# Altium PCB LCT PCB.PcbDoc (part 2 of 2)
Units mm, origin at the board's own origin, x right, y up, seen from the top; angles counter-clockwise.
Board outline 112 x 147.95 mm, 6 copper layers (Top, Gnd, HighSpeed, High speed, Power, Bottom), stack 2.576 mm thick; 249 components, 161 nets, 810 pads, 262 vias.
Unrouted connection lines stored in the file: 3.
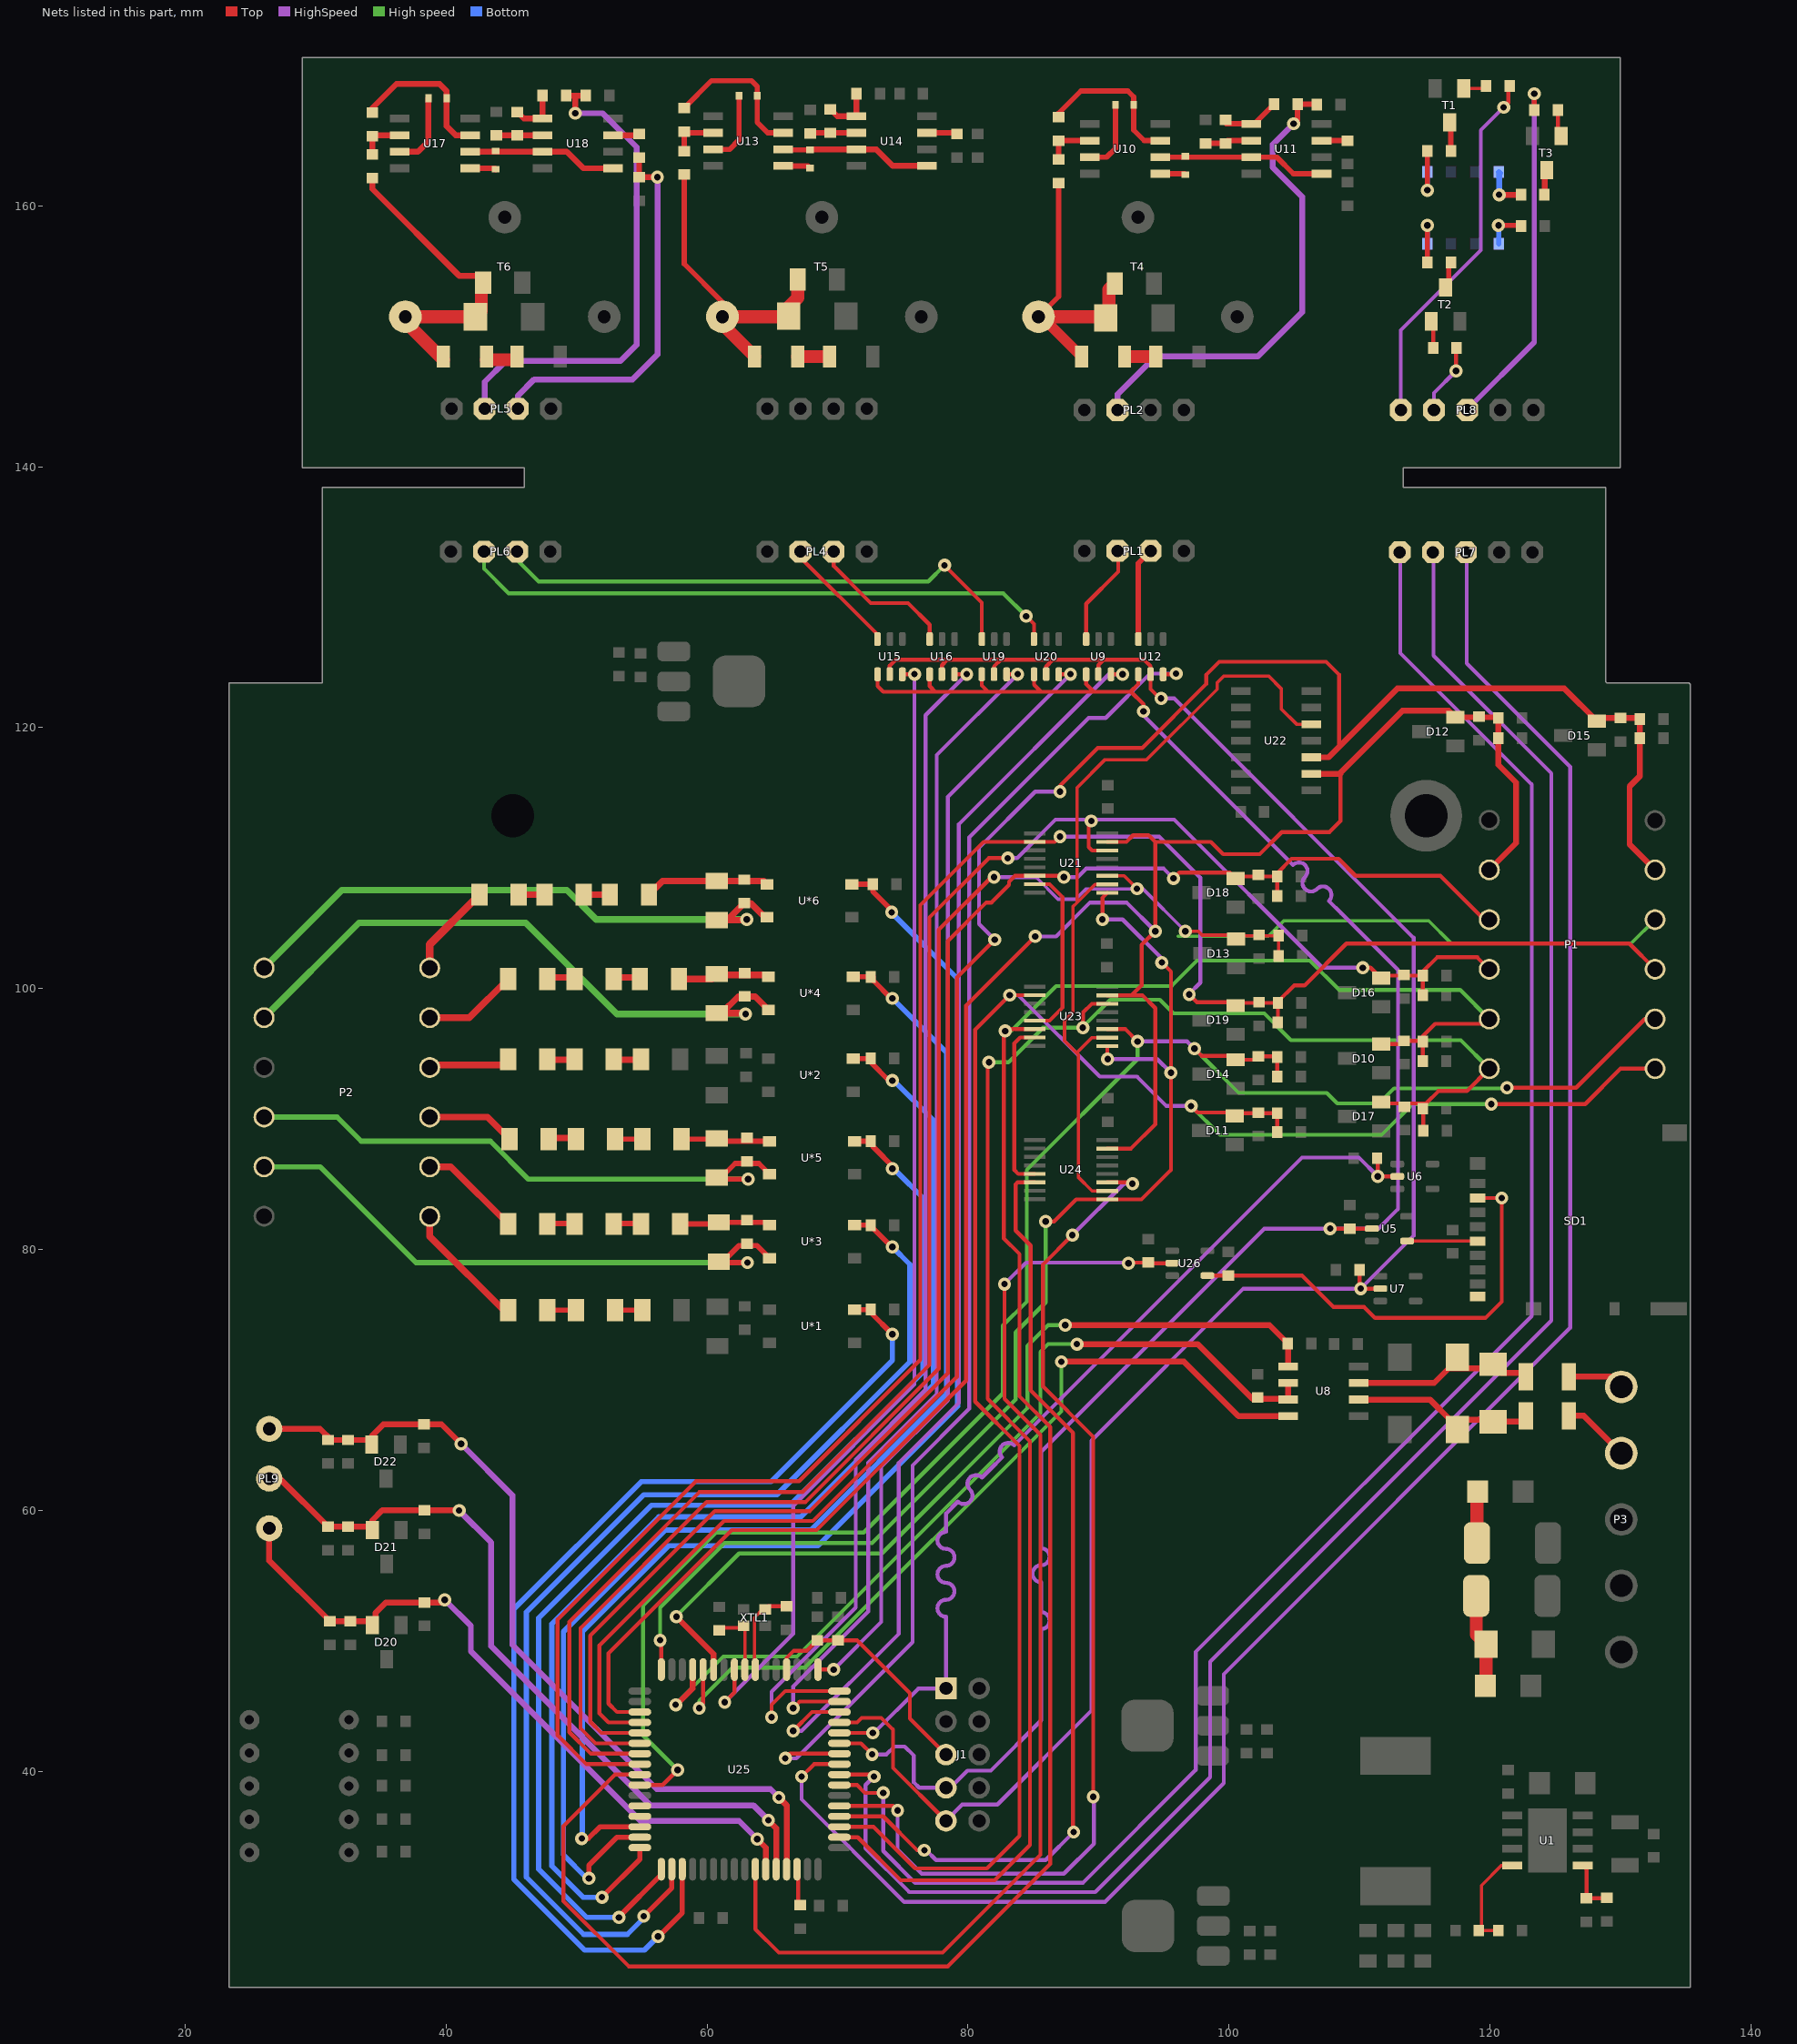
[diagram p6: the nets of this part, all layers, seen from the top]

## Via types
v1: diameter 1, hole 0.5, Top to Bottom, 262 vias

## Nets (pads, with @x,y where several pads share a name; then routed paths per layer and width w, separated by ;. In a path a pad name is that pad's centre, name@x,y a point inside that pad or via, vN(x,y) a via of type N, cw(c..) or ccw(c..) an arc to the next point about the centre after c; other vN are vias at no path point) (continued)
NetC20_1: C20.1 P2.3 R56.1 U*3.2 | length 47.3
  Top w0.4: v1(63.1,79) 60.98,79 R56.1@60.9,79.08 61.23,79.08 62.45,80.3 62.9,80.3 C20.1@63.05,80.45 63.2,80.3 63.832,80.3 U*3.2@64.8,79.332
  High speed w0.4: P2.3@26.05,86.34 30.36,86.34 37.7,79 v1(63.1,79)
NetC20_2: C20.2 R53.2 R56.2 U*3.1 | length 7.1
  Top w0.4: R53.2@57.95,81.96 60.78,81.96 R56.2@60.9,82.08 R56.2@60.97,82.08 ; R56.2@60.865,82.115 60.9,82.15 R56.2@60.97,82.08 ; U*3.1@64.8,82.04 64.76,82.08 R56.2@60.97,82.08
NetC21_1: C21.1 P2.9 R60.1 U*4.2 | length 50.1
  Top w0.5: v1(62.95,98.05) 62.88,98.12 R60.1@60.75,98.12 61.12,98.12 62.397,99.397 C21.1@62.9,99.397 63.681,99.397 U*4.2@64.7,98.378 ; U*4.2@64.563,98.497 U*4.2@64.7,98.36
  High speed w0.5: P2.9@26.05,97.77 33.33,105.05 46.1,105.05 53.1,98.05 v1(62.95,98.05)
NetC21_2: C21.2 R57.2 R60.2 U*4.1 | length 7.1
  Top w0.5: R57.2@57.85,100.74 60.37,100.74 R60.2@60.75,101.12 ; R60.2@60.75,101.05 64.55,101.05 U*4.1@64.7,100.9
NetC22_1: C22.1 P2.5 R66.1 U*5.2 | length 46.7
  Top w0.4: v1(63.15,85.4) 60.64,85.4 R66.1@60.75,85.51 61.06,85.51 62.15,86.6 62.9,86.6 C22.1@63.05,86.75 63.2,86.6 63.964,86.6 U*5.2@64.8,85.764
  High speed w0.4: P2.5@26.05,90.15 31.65,90.15 33.5,88.3 43.4,88.3 46.3,85.4 v1(63.15,85.4)
NetC22_2: C22.2 R63.2 R66.2 U*5.1 | length 6.9
  Top w0.4: R63.2@58.05,88.47 60.71,88.47 R66.2@60.75,88.51 60.956,88.304 U*5.1@64.8,88.304
NetC23_1: C23.1 P2.11 R70.1 U*6.2 | length 46.8
  Top w0.5: R70.1@60.75,105.25 R70.1@61.55,105.25 ; v1(63.05,105.3) 63,105.25 R70.1@61.55,105.25 ; U*6.2@64.6,105.46 64.44,105.46 63.35,106.55 C23.1@62.85,106.55 R70.1@61.55,105.25
  High speed w0.5: P2.11@26.05,101.58 32.02,107.55 49.25,107.55 51.5,105.3 v1(63.05,105.3)
NetC23_2: C23.2 R67.2 R70.2 U*6.1 | length 9.6
  Top w0.5: R67.2@55.55,107.2 56.6,108.25 R70.2@60.75,108.25 64.35,108.25 U*6.1@64.6,108
NetC24_2: C24.2 D10.2 P1.10 R71.2 R75.2 U23.6 U25.41 | length 175.8
  Top w0.3: U25.41@54.85,39.75 52.95,39.75 49,35.8 49,30.05 54,25.05 78.45,25.05 86.3,32.9 86.3,66.4 83.95,68.75 83.95,79.65 82.75,80.85 82.75,96.35 83.3,96.9 U23.6@85.125,96.9 ; D10.2@111.65,95.75 113.147,95.75 R75.2@113.4,96.003 114.797,96.003 R71.2@114.85,95.95 114.847,95.947 C24.2@114.847,94.45 ; R71.2@114.85,95.6 114.85,96.35 115.8,97.3 119.58,97.3 P1.10@119.95,97.67
  High speed w0.3: v1(82.85,96.75) 83.3,96.75 86.75,100.2 95.6,100.2 97.55,102.15 106.2,102.15 108.45,99.9 117.72,99.9 P1.10@119.95,97.67
NetC25_2: C25.2 D11.2 P1.11 R72.2 R76.2 U23.2 U25.3 | length 149.5
  Top w0.3: U25.3@70.15,35.75 72.75,35.75 75.95,32.55 81.45,32.55 83.95,35.05 83.95,64.95 80.55,68.35 80.55,96.85 v1(83.2,99.5) U23.2@85.125,99.5 ; v1(97.1,91) 97.6,90.5 100.185,90.5 D11.2@100.45,90.235 100.665,90.45 R72.2@103.7,90.45 R76.2@103.7,89 ; v1(120.1,91.15) 127.3,91.15 130.01,93.86 P1.11@132.65,93.86
  HighSpeed w0.3: v1(83.2,99.5) 83.85,99.5 90.1,93.25 92.95,93.25 95.2,91 v1(97.1,91)
  High speed w0.3: v1(97.1,91) 99.3,88.8 111.7,88.8 114.05,91.15 v1(120.1,91.15)
NetC26_2: C26.2 D12.2 P1.4 R73.2 R77.2 U21.15 U22.2 U23.15 U24.15 U25.35 | length 173
  Top w0.3: U25.35@54.85,44.55 53.1,44.55 52.45,45.2 52.45,49.05 61.9,58.5 68.4,58.5 79.85,69.95 79.85,98.7 v1(85.15,104) ; U24.15@90.675,87.74 92.49,87.74 94.35,89.6 94.35,98.5 93.36,99.49 U23.15@90.675,99.49 ; U21.15@90.675,111.24 92.14,111.24 92.65,111.75 93.84,111.75 94.35,111.24 ; 92.54,99.49 93.3,100.25 93.3,103.35 v1(94.35,104.4) 94.35,111.24 ; 108.55,116.46 108.55,112.85 107.7,112 104.05,112 102.35,110.3 99.55,110.3 98.61,111.24 94.35,111.24
  Top w0.45: U22.2@106.3,116.46 108.55,116.46 108.55,116.55 113.3,121.3 116.85,121.3 D12.2@117.35,120.8 120.547,120.8 R77.2@120.647,120.7 ; P1.4@119.95,109.1 122,111.15 122,115.8 120.647,117.153 R73.2@120.647,119.2 R77.2@120.647,120.7 ; R77.2@120.647,120.75 R77.2@120.647,120.7
  HighSpeed w0.3: v1(85.15,104) 86.75,104 89.35,106.6 92.15,106.6 v1(94.35,104.4)
NetC27_2: C27.2 D13.2 P1.5 R74.2 R78.2 U21.11 U25.38 | length 155.2
  Top w0.254: U21.11@90.675,108.64 91.96,108.64 v1(92.95,107.65) ; v1(96.65,104.4) 97.65,104.4 97.95,104.1 100.25,104.1 D13.2@100.55,103.8 100.8,104.05 R74.2@103.8,104.05 103.8,102.503 R78.2@103.797,102.5
  Top w0.3: U25.38@54.85,42.15 51.45,42.15 50.3,43.3 50.3,50.975 59.975,60.65 67.55,60.65 77.75,70.85 77.75,104.5 81.8,108.55 v1(82,108.55)
  HighSpeed w0.254: 85.25,108.5 86.9,106.85 88.25,106.85 89.05,107.65 v1(92.95,107.65) 93.4,107.65 v1(96.65,104.4)
  HighSpeed w0.3: v1(82,108.55) 85.2,108.55 85.25,108.5
  High speed w0.254: 96.1,104 103,104 104.2,105.2 115.3,105.2 117,103.5 130.86,103.5 P1.5@132.65,105.29
NetC28_2: C28.2 D14.2 P1.9 R79.2 R82.2 U23.11 U25.42 | length 138.7
  Top w0.3: U25.42@54.85,38.95 56.6,38.95 v1(57.75,40.1) ; U23.11@90.675,96.89 92.06,96.89 v1(93,95.95) ; v1(97.35,95.4) 97.9,94.85 100.2,94.85 D14.2@100.5,94.55 102,94.55 C28.2@102.25,94.8 103.647,94.8 R79.2@103.697,94.75 ; R82.2@103.697,93.25 R79.2@103.697,94.75 ; R79.2@103.872,94.75 R79.2@103.697,94.75 ; v1(121.3,92.4) 126.6,92.4 131.87,97.67 P1.9@132.65,97.67
  HighSpeed w0.3: v1@93.05,95.95 96.8,95.95 v1(97.35,95.4)
  High speed w0.3: v1(57.75,40.1) 55.1,42.75 55.1,52.7 60.7,58.3 72,58.3 82.675,68.975 82.675,74.175 84.5,76 84.5,86.1 93,94.6 v1(93,95.95) ; v1(97.35,95.4) 100.75,92 107.5,92 108.3,91.2 111.5,91.2 112.65,92.35 121.6,92.35 121.55,92.4 v1(121.3,92.4)
NetC29_2: C29.2 D15.2 P1.3 R80.2 R83.2 U22.3 U25.36 | length 168.7
  Top w0.254: 130.945,120.666 R83.2@131.497,120.666
  Top w0.3: U25.36@54.85,43.75 52.45,43.75 51.75,44.45 51.75,49.65 61.3,59.2 68.11,59.2 79.15,70.24 79.15,100.85 v1(82.05,103.75) ; v1(87.05,115.1) 87.05,115.55 89.95,118.45 93.35,118.45 98.25,123.35 98.25,124.05 99.25,125.05 107.45,125.05 108.43,124.07 108.43,118.53
  Top w0.45: U22.3@106.3,117.73 107.63,117.73 108.43,118.53 112.9,123 125.7,123 D15.2@128.2,120.5 128.45,120.75 C29.2@130,120.75 131.497,120.75 R83.2@131.497,120.666 131.497,119.203 R80.2@131.5,119.2 131.5,116.3 130.7,115.5 130.7,111.05 P1.3@132.65,109.1
  HighSpeed w0.3: v1(82.05,103.75) 80.85,104.95 80.85,110.8 85.15,115.1 v1(87.05,115.1)
NetC30_2: C30.2 D16.2 P1.8 R81.2 R84.2 U21.14 U25.39 | length 142.5
  Top w0.3: U25.39@54.85,41.35 51.1,41.35 49.45,43 49.45,51.45 59.4,61.4 67.3,61.4 77.05,71.15 77.05,105.45 81.6,110 v1(83.05,110) ; v1(89.45,112.85) 89.3,112.85 89.25,112.8 89.25,110.85 89.51,110.59 U21.14@90.675,110.59 ; v1(110.25,101.6) 110.85,101.6 D16.2@111.65,100.8 111.85,101 R81.2@114.847,101 ; R84.2@114.847,99.5 R81.2@114.847,101 ; R81.2@114.85,101 R81.2@114.847,101 ; P1.8@119.47,101.48 P1.8@119.95,101.48 119.03,102.4 115.95,102.4 114.847,101.297 R81.2@114.847,101
  HighSpeed w0.3: v1(83.05,110) 83.75,110 86.7,112.95 95.8,112.95 107.15,101.6 v1(110.25,101.6)
NetC31_2: C31.2 D17.2 P1.12 R85.2 R88.2 U23.14 U25.2 | length 135.5
  Top w0.3: U25.2@70.15,34.95 71.55,34.95 74.85,31.65 82.05,31.65 84.75,34.35 84.75,65.3 81.5,68.55 81.5,94.25 v1(81.6,94.35) ; v1(88.8,97) 88.8,98.15 89.49,98.84 U23.14@90.675,98.84 ; D17.2@111.65,91.3 111.75,91.2 115.1,91.2 116.05,92.15 118.24,92.15 P1.12@119.95,93.86 ; R85.2@114.847,90.8 114.897,90.75 R88.2@114.897,89.1
  High speed w0.3: v1(81.6,94.35) 83.1,94.35 85.75,97 v1(88.8,97) 88.8,97.05 90.9,99.15 94.7,99.15 95.75,98.1 102.7,98.1 104.75,96.05 117.76,96.05 P1.12@119.95,93.86
NetC32_2: C32.2 D18.2 P1.6 R86.2 R89.2 U21.6 U25.37 | length 128.5
  Top w0.3: U25.37@54.85,42.95 51.9,42.95 51.05,43.8 51.05,50.4 60.6,59.95 67.87,59.95 78.45,70.53 78.45,103.65 81.4,106.6 81.8,106.6 83.15,107.95 83.15,108.2 83.6,108.65 84.022,108.65 ; 84.1,108.65 U21.6@85.125,108.65 87.35,108.65 v1(87.35,108.55) ; v1(95.75,108.45) 96.2,108.9 100.05,108.9 D18.2@100.5,108.45 100.65,108.6 R86.2@103.697,108.6 ; R89.2@103.697,107.1 R86.2@103.697,108.6 ; P1.6@119.95,105.29 119.56,105.29 116.2,108.65 109.7,108.65 108.4,109.95 104.8,109.95 103.697,108.847 R86.2@103.697,108.6
  HighSpeed w0.3: v1(87.35,108.55) 88.4,108.55 89.05,109.2 95,109.2 v1(95.75,108.45)
NetC33_2: C33.2 D19.2 P1.7 R87.2 R90.2 U21.2 U25.40 | length 161.6
  Top w0.3: U25.40@54.85,40.55 50.75,40.55 48.55,42.75 48.55,51.65 59.15,62.25 67.05,62.25 76.35,71.55 76.35,106.4 81.2,111.25 U21.2@85.125,111.25 86.65,111.25 v1(87.05,111.65) ; v1(96.95,99.55) 97.55,98.95 100.25,98.95 D19.2@100.5,98.7 100.7,98.9 R87.2@103.75,98.9 ; R90.2@103.747,97.4 103.75,97.403 R87.2@103.75,98.9 ; P1.7@132.65,101.48 130.68,103.45 109,103.45 105.8,100.25 105,100.25 103.75,99 R87.2@103.75,98.9
  HighSpeed w0.3: v1(87.05,111.65) 94.65,111.65 97.8,108.5 97.8,100.45 96.95,99.6 v1(96.95,99.55)
NetC34_2: C34.2 U25.62 | length 2.9
  Top w0.3: U25.62@66.9,32.5 66.975,32.425 66.975,29.925 C34.2@67.15,29.75
NetC35_2: C35.2 J1.5 R91.1 U25.20 | length 18.4
  Top w0.3: U25.20@66.1,47.8 66.1,48.7 66.65,49.25 67.653,49.25 R91.1@68.45,50.047 C35.2@70.05,50.047 71.503,50.047 75.55,46 75.55,44.04 J1.5@78.31,41.28
NetC36_2: C36.2 U25.24 XTL1.1 | length 5.4
  Top w0.25: XTL1.1@62.8,51.15 62.9,51.05 U25.24@62.9,47.8
  Top w0.3: C36.2@60.95,50.8 61.15,51 62.65,51 XTL1.1@62.8,51.15
NetC37_2: C37.2 U25.23 XTL1.3 | length 6.8
  Top w0.25: U25.23@63.63,47.87 63.63,51.78 XTL1.3@64.25,52.4
  Top w0.3: U25.23@63.63,47.87 U25.23@63.7,47.8 ; XTL1.3@64.25,52.4 XTL1.3@64.45,52.4 64.7,52.65 C37.2@66.1,52.65
NetC38_2: C38.2 D20.2 PL9.1 R92.2 R93.2 U25.59 | length 54.6
  Top w0.45: PL9.1@26.45,58.63 26.45,56.15 R93.2@31.1,51.5 R92.2@32.65,51.5 34.3,51.5 34.6,51.2 34.6,52.15 35.4,52.95 C38.2@38.35,52.95 39.7,52.95 v1(39.9,53.15) ; v1(63.85,34.8) 64.5,34.15 U25.59@64.5,32.5
  HighSpeed w0.45: v1(39.9,53.15) 41.9,51.15 41.9,49.2 54.9,36.2 62.45,36.2 v1(63.85,34.8)
NetC39_2: C39.2 D21.2 PL9.2 R94.2 R95.2 U25.60 | length 59.9
  Top w0.45: PL9.2@26.76,62.75 PL9.2@26.45,62.44 27.263,62.44 R95.2@30.95,58.753 32.497,58.753 R94.2@32.5,58.75 34.1,58.75 D21.2@34.35,58.5 34.35,59.25 35.103,60.003 C39.2@38.35,60.003 40.997,60.003 v1(41,60) ; v1(64.7,36.25) 65.3,35.65 U25.60@65.3,32.5
  HighSpeed w0.45: v1(41,60) 43.45,57.55 43.45,49.6 55.65,37.4 63.55,37.4 v1(64.7,36.25)
NetC40_2: C40.2 D22.2 PL9.3 R96.2 R97.2 U25.61 | length 65.5
  Top w0.45: PL9.3@26.45,66.9 PL9.3@26.45,66.25 30.35,66.25 31.2,65.4 R96.2@32.5,65.4 33.95,65.4 D22.2@34.3,65.05 34.3,65.7 35.2,66.6 C40.2@38.3,66.6 39.65,66.6 v1(41.15,65.1) ; v1(65.5,38) 66.1,37.4 U25.61@66.1,32.5
  HighSpeed w0.45: v1(41.15,65.1) 45.1,61.15 45.1,49.7 56.15,38.65 64.85,38.65 v1(65.5,38)
NetC41_2: C41.2 PL2.3 R23.1 | length 37.1
  Top w0.4: v1(104.95,166.3) 105.25,166.6 R23.1@105.25,167.8 C41.2@106.697,167.8
  HighSpeed w0.45: PL2.3@91.46,144.35 91.46,145.56 94.35,148.45 102.2,148.45 105.6,151.85 105.6,160.7 103.35,162.95 103.35,164.7 v1(104.95,166.3)
NetC42_2: C42.2 PL5.2 R35.1 | length 29.5
  Top w0.45: R35.1@54.8,163.7 C42.2@54.8,162.2 v1(56.2,162.2)
  HighSpeed w0.45: PL5.2@45.5,144.45 45.5,145.45 46.75,146.7 54.3,146.7 56.2,148.6 v1(56.2,162.2)
NetC43_2: C43.2 PL5.3 R38.1 | length 38.6
  Top w0.45: R38.1@49.203,168.45 49.9,168.45 ; v1(49.9,167.1) 49.9,168.45 ; C43.2@50.7,168.45 49.9,168.45
  HighSpeed w0.45: PL5.3@42.96,144.45 42.96,146.51 44.55,148.1 53.35,148.1 54.6,149.35 54.6,164.5 52,167.1 v1(49.9,167.1)
NetD1_2: D1.2 F1.1 | length 4.7
  Top w0.3: F1.1@118.95,56.75 119,56.8 F1.1@119,57.5
  Top w1: F1.1@119,57.5 119,61.4 D1.2@119.05,61.45
NetD2_2: D2.2 F2.1 TVS1.1 | length 11.1
  Top w0.25: D2.2@119.65,46.25 D2.2@119.65,46.55 TVS1.1@119.65,49.8
  Top w1: F2.1@118.95,53.45 118.95,50.5 119.65,49.8 TVS1.1@119.7,49.75 119.7,46.3 D2.2@119.65,46.25
NetD4_1: D4.1 U10.7 | length 5.6
  Top w0.4: U10.7@89.347,163.73 90.627,163.73 91.297,164.4 D4.1@91.297,167.75
NetD4_2: D4.2 R22.1 U10.3 | length 11.9
  Top w0.4: R22.1@86.947,166.803 86.947,167.1 88.647,168.8 92.247,168.8 92.694,168.353 D4.2@92.694,167.75 92.694,165.803 93.497,165 U10.3@94.747,165
NetD5_1: D5.1 U10.1 | length 1.9
  Top w0.4: U10.1@94.747,162.46 96.59,162.46 D5.1@96.647,162.403
NetD5_2: D5.2 U10.2 U11.3 U11.5 | length 12.9
  Top w0.4: U10.2@94.747,163.73 96.577,163.73 D5.2@96.647,163.8 96.717,163.73 U11.3@101.697,163.73 103.667,163.73 104.937,162.46 U11.5@107.097,162.46
NetD6_1: D6.1 U13.7 | length 5.7
  Top w0.4: U13.7@60.45,164.33 61.73,164.33 62.453,165.053 D6.1@62.453,168.45
NetD6_2: D6.2 R29.1 U13.3 | length 11.7
  Top w0.4: R29.1@58.25,167.503 60.347,169.6 63.4,169.6 63.85,169.15 D6.2@63.85,168.45 63.85,166.4 64.65,165.6 U13.3@65.85,165.6
NetD7_1: D7.1 U13.1 | length 2.1
  Top w0.4: U13.1@65.85,163.06 67.74,163.06 D7.1@67.9,162.9
NetD7_2: D7.2 U13.2 U14.3 U14.5 | length 11.6
  Top w0.4: U13.2@65.85,164.33 65.883,164.297 D7.2@67.9,164.297
  Top w0.45: D7.2@67.9,164.297 67.933,164.33 U14.3@71.45,164.33 72.97,164.33 74.24,163.06 U14.5@76.85,163.06
NetD8_1: D8.1 U17.7 | length 5.8
  Top w0.45: U17.7@36.45,164.15 37.85,164.15 38.653,164.953 D8.1@38.653,168.25
NetD8_2: D8.2 R36.1 U17.3 | length 11.8
  Top w0.45: R36.1@34.35,167.153 34.35,167.5 36.2,169.35 39.5,169.35 40.05,168.8 D8.2@40.05,168.25 40.05,166.1 40.73,165.42 U17.3@41.85,165.42
NetD9_1: D9.1 U17.1 | length 2
  Top w0.45: U17.1@41.85,162.88 43.723,162.88 D9.1@43.8,162.803
NetD9_2: D9.2 U17.2 U18.3 U18.5 | length 11.5
  Top w0.45: U17.2@41.85,164.15 U18.3@47.4,164.15 49.25,164.15 50.52,162.88 U18.5@52.8,162.88
NetD23_1: D23.1 R20.2 R24.2 T4.1 TVS5.2 | length 23.3
  Top w0.4: T4.1@85.4,151.507 86.95,153.057 R20.2@86.95,161.747
  Top w0.8: T4.1@85.4,151.507 85.643,151.507 D23.1@88.7,148.45
  Top w1: T4.1@85.643,151.507 90.443,151.507 TVS5.2@90.55,151.4 90.8,151.65 90.8,153.6 R24.2@91.25,154.05
NetD23_2: D23.2 D24.2 | length 2.4
  Top w1: D23.2@92,148.45 D24.2@94.4,148.45
NetD25_1: D25.1 R27.2 R30.2 T5.1 TVS6.2 | length 24.4
  Top w0.4: R27.2@58.25,162.397 58.25,155.55 61.18,152.62 T5.1@61.18,151.507
  Top w1: D25.1@63.65,148.45 61.18,150.92 T5.1@61.18,151.507 66.207,151.507 TVS6.2@66.25,151.55 66.25,152.25 66.95,152.95 R30.2@66.95,154.35
NetD25_2: D25.2 D26.2 | length 2.4
  Top w1: D25.2@66.95,148.45 D26.2@69.4,148.45
NetD27_1: D27.1 R34.2 R37.2 T6.1 TVS7.2 | length 25.1
  Top w0.45: R34.2@34.35,162.147 34.35,161.3 41,154.65 42.3,154.65 R37.2@42.85,154.1
  Top w1: D27.1@39.8,148.2 36.88,151.12 T6.1@36.88,151.507 36.887,151.5 TVS7.2@42.25,151.5 42.7,151.95 42.7,153.95 R37.2@42.85,154.1
NetD27_2: D27.2 D28.2 | length 2.4
  Top w1: D27.2@43.1,148.2 45.4,148.2 D28.2@45.45,148.25
NetF3_1: F3.1 P3.1 | length 4.3
  Top w0.45: F3.1@126.05,70.25 129.28,70.25 P3.1@130.061,69.469
NetF3_2: F3.2 TVS2.2 TVS4.2 U8.7 | length 14.2
  Top w0.45: U8.7@109.55,69.77 115.72,69.77 116.85,70.9 119.95,70.9 TVS2.2@120.25,71.2 120.9,70.55 122.45,70.55 F3.2@122.75,70.25
NetF4_1: F4.1 P3.2 | length 5.2
  Top w0.45: F4.1@126.05,67.25 127.2,67.25 P3.2@130.061,64.389
NetF4_2: F4.2 TVS2.1 TVS3.2 U8.6 | length 14.1
  Top w0.45: U8.6@109.55,68.5 115.4,68.5 116.95,66.95 120.1,66.95 TVS2.1@120.25,66.8 122.3,66.8 F4.2@122.75,67.25
NetJ1_1: J1.1 R15.1 U6.2 U25.12 | length 76.8
  Top w0.3: U25.12@70.15,42.95 v1(72.7,42.95) ; R15.1@111.35,87 111.4,86.95 v1(111.4,85.6) U6.2@112.9,85.6
  HighSpeed w0.3: v1(72.7,42.95) 72.8,42.95 76.2,46.35 78.3,46.35 J1.1@78.31,46.36 78.31,51.85 cw(c78.31,52.5) 78.31,53.15 ccw(c78.31,53.8) 78.31,54.45 cw(c78.31,55.1) 78.31,55.75 ccw(c78.31,56.4) 78.31,57.05 cw(c78.31,57.7) 78.31,58.35 78.31,59.65 78.31,59.76 79.229,60.679 ccw(c79.689,61.139) 80.148,61.598 cw(c80.608,62.058) 81.068,62.518 81.7,63.15 82.619,64.069 cw(c83.079,64.529) 83.538,64.988 84.05,65.5 105.6,87.05 109.95,87.05 v1(111.4,85.6)
NetJ1_7: J1.7 R14.1 U5.2 U9.4 U12.4 U15.4 U16.4 U19.4 U20.4 U25.11 | length 160.4
  Top w0.3: U25.11@70.15,42.15 71.8,42.15 v1(72.65,41.3) ; U15.4@73.065,124.092 73.065,123.185 73.5,122.75 77.5,122.75 ; U16.4@77.062,124.092 77.062,123.188 77.5,122.75 ; U19.4@81.059,124.092 81.059,123.241 81.55,122.75 ; U20.4@85.056,124.092 85.056,123.294 85.6,122.75 ; U9.4@89.053,124.092 89.053,123.347 89.65,122.75 ; 92.45,122.75 89.65,122.75 ; U12.4@93.05,124.042 93.05,123.35 92.475,122.775 93.45,121.8 v1(93.45,121.25) ; v1(107.75,81.6) 109.247,81.6 R14.1@109.25,81.597 110.947,81.597 U5.2@110.95,81.6 ; 77.5,122.75 81.55,122.75 ; 81.55,122.75 85.6,122.75 ; 85.6,122.75 89.65,122.75
  HighSpeed w0.3: v1(72.65,41.3) 73.75,41.3 74.35,41.9 75.15,41.9 75.85,41.2 75.85,39.15 76.26,38.74 J1.7@78.31,38.74 78.64,38.74 79.95,40.05 81.75,40.05 85.6,43.9 85.6,50.2 85.6,50.9 ccw(c85.6,51.55) 85.6,52.2 85.6,54.5 cw(c85.6,55.15) 85.6,55.8 ccw(c85.6,56.45) 85.6,57.1 85.6,58.4 85.6,58.5 85.6,59.8 85.6,60.65 85.6,64.5 102.7,81.6 v1(107.75,81.6) 111.45,81.6 112.95,83.1 112.95,101.43 108.58,105.8 107.661,106.719 ccw(c107.202,107.179) 106.742,107.638 cw(c106.282,108.098) 105.823,108.558 ccw(c105.363,109.017) 104.903,109.477 104.65,109.73 93.45,120.93 v1(93.45,121.25)
NetJ1_9: J1.9 R17.1 U7.2 U9.5 U12.5 U15.5 U16.5 U19.5 U20.5 U25.13 | length 162
  Top w0.3: U25.13@70.15,43.75 71.5,43.75 71.85,44.1 73.35,44.1 74.25,43.2 74.25,40.26 J1.9@78.31,36.2 ; U15.5@74,124.1 74,124.75 74.45,125.2 78.4,125.2 ; U16.5@77.997,124.1 77.997,124.797 78.4,125.2 ; U19.5@81.994,124.1 81.994,124.694 82.5,125.2 ; U20.5@85.991,124.1 85.991,124.691 86.5,125.2 ; U9.5@89.988,124.1 89.988,124.788 90.4,125.2 ; U12.5@93.985,124.05 93.985,124.715 93.5,125.2 86.5,125.2 ; U12.5@93.985,124.1 93.985,122.965 94.8,122.15 v1(94.8,122.25) ; R17.1@110.1,78.353 R17.1@110.003,78.45 110.003,77.097 v1(110.1,77) U7.2@111.6,77 ; 78.4,125.2 82.5,125.2 ; 82.5,125.2 86.5,125.2
  HighSpeed w0.3: J1.9@78.31,36.2 79.56,37.45 82.25,37.45 89.45,44.65 89.45,65.35 101.1,77 v1(110.1,77) 114.15,81.05 114.15,103.9 95.8,122.25 v1(94.8,122.25)
NetLED1_2: LED1.2 R7.1 | length 4.4
  Top w0.4: v1(115.2,161.2) R7.1@115.2,164.2
  Bottom w0.4: v1@115.197,161.203 LED1.2@115.197,162.6
NetLED2_2: LED2.2 R8.1 | length 4.2
  Top w0.4: R8.1@115.197,155.65 115.2,155.653 v1(115.2,158.5)
  Bottom w0.4: LED2.2@115.197,157.1 v1@115.197,158.447
NetLED3_2: LED3.2 R12.1 | length 3.5
  Top w0.45: v1(120.7,160.85) R12.1@122.4,160.85
  Bottom w0.45: LED3.2@120.675,162.6 120.775,162.5 120.7,162.425 v1(120.7,160.85)
NetLED6_2: LED6.2 R11.2 | length 3.1
  Top w0.4: v1(120.65,158.5) 122.347,158.5 R11.2@122.397,158.45
  Bottom w0.4: LED6.2@120.675,157.1 v1@120.675,158.475
NetP2_2: P2.2 R44.1 | length 10.4
  Top w0.5: P2.2@38.75,82.53 38.75,81 R44.1@44.75,75 ; R44.1@44.75,75.35 R44.1@44.75,75.7
NetP2_4: P2.4 R54.1 | length 7.8
  Top w0.5: P2.4@38.75,86.34 40.37,86.34 R54.1@44.75,81.96
NetP2_6: P2.6 R64.1 | length 6.8
  Top w0.5: P2.6@38.75,90.15 43.17,90.15 R64.1@44.85,88.47
NetP2_8: P2.8 R48.1 | length 6.3
  Top w0.5: P2.8@38.75,93.96 38.94,94.15 44.32,94.15 R48.1@44.75,94.58
NetP2_10: P2.10 R58.1 | length 7.2
  Top w0.5: P2.10@38.75,97.77 41.78,97.77 R58.1@44.75,100.74
NetP2_12: P2.12 R68.1 | length 6.9
  Top w0.6: P2.12@38.75,101.58 38.75,103.39 42.35,106.99 R68.1@42.35,107
NetPL1_2: PL1.2 U12.3 | length 7.2
  Top w0.4: U12.3@93.05,126.792 93.05,132.6 PL1.2@94,133.55
NetPL1_3: PL1.3 U9.3 | length 7.8
  Top w0.3: U9.3@89.053,126.792 89.053,129.503 91.51,131.96 91.51,133.5 PL1.3@91.46,133.55
NetPL4_2: PL4.2 U16.3 | length 11.4
  Top w0.3: PL4.2@69.7,133.5 69.7,132.4 72.55,129.55 75.4,129.55 77.062,127.888 U16.3@77.062,126.792
NetPL4_3: PL4.3 U15.3 | length 9.2
  Top w0.3: PL4.3@67.16,133.5 67.21,133.45 67.21,132.99 73.065,127.135 U15.3@73.065,126.792
NetPL6_2: PL6.2 U19.3 | length 41.4
  Top w0.3: v1(78.2,132.45) 81.059,129.591 U19.3@81.059,126.792
  High speed w0.3: PL6.2@45.45,133.5 45.45,132.85 47.1,131.2 76.95,131.2 v1(78.2,132.45)
NetPL6_3: PL6.3 U20.3 | length 46.4
  Top w0.3: v1(84.45,128.55) 85.056,127.944 U20.3@85.056,126.792
  High speed w0.3: PL6.3@42.91,133.5 42.91,132.19 44.8,130.3 82.7,130.3 v1(84.45,128.55)
NetPL7_1: PL7.1 U25.7 | length 144.8
  Top w0.3: U25.7@70.15,38.95 71.5,38.95 72.1,38.35 v1(73.5,38.35)
  HighSpeed w0.3: v1(73.5,38.35) 73.5,33.9 75.95,31.45 88.8,31.45 97.45,40.1 97.45,49.15 123.2,74.9 123.2,115.65 113.134,125.716 113.134,133.4 PL7.1@113.084,133.45
NetPL7_2: PL7.2 U25.8 | length 148.2
  Top w0.3: U25.8@70.15,39.75 v1@72.65,39.75
  HighSpeed w0.3: v1(72.8,39.6) 72.15,38.95 72.15,34.1 75.5,30.75 89.75,30.75 98.55,39.55 98.55,48.4 124.7,74.55 124.7,116.5 115.674,125.526 115.674,133.4 PL7.2@115.624,133.45
NetPL7_3: PL7.3 U25.9 | length 153.1
  Top w0.3: v1(67.25,39.6) 68.2,40.55 U25.9@70.15,40.55
  HighSpeed w0.3: v1(67.25,39.6) 67.25,37.85 75.1,30 90.5,30 99.6,39.1 99.6,47.45 126.15,74 126.15,117 118.214,124.936 118.214,133.4 PL7.3@118.164,133.45
NetPL8_3: PL8.3 R13.2 | length 27.5
  Top w0.4: R13.2@123.397,167.35 v1@123.397,168.497
  HighSpeed w0.4: PL8.3@118.25,144.35 118.25,144.4 123.4,149.55 v1(123.4,168.6)
NetPL8_4: PL8.4 R10.2 | length 5.5
  Top w0.3: v1(117.4,147.35) 117.4,148.95 117.5,149.05 R10.2@117.45,149.1
  HighSpeed w0.3: PL8.4@115.71,144.35 115.71,145.66 v1(117.4,147.35)
NetPL8_5: PL8.5 R9.2 | length 28.3
  Top w0.3: v1(121.05,167.55) 121.4,167.9 121.4,169.097 R9.2@121.503,169.2
  HighSpeed w0.3: PL8.5@113.17,144.35 113.17,150.47 119.3,156.6 119.3,165.8 v1(121.05,167.55)
NetR1_1: R1.1 R4.2 U1.5 | length 4.2
  Top w0.3: U1.5@127.1,32.795 127.4,32.495 R4.2@127.4,30.278 128.925,30.278 R1.1@128.95,30.303
NetR2_1: R2.1 R3.2 U1.4 | length 8
  Top w0.25: R3.2@120.65,27.8 R2.1@119.153,27.8 119.35,27.997 119.35,31.25 120.895,32.795 U1.4@121.7,32.795
NetR7_2: R7.2 T1.3 | length 2.2
  Top w0.4: T1.3@116.9,166.4 117.003,166.297 R7.2@117.003,164.2
NetR8_2: R8.2 T2.3 | length 2.1
  Top w0.4: T2.3@116.6,153.75 116.85,154 116.85,155.5 R8.2@117,155.65
NetR9_1: R9.1 T1.1 | length 1.8
  Top w0.254: T1.1@118,169 119.5,169 R9.1@119.7,169.2
NetR10_1: R10.1 T2.1 | length 2.1
  Top w0.3: T2.1@115.5,151.15 115.647,151.003 R10.1@115.647,149.1
NetR12_2: R12.2 T3.3 | length 2
  Top w0.45: R12.2@124.203,160.85 124.203,162.603 T3.3@124.35,162.75
NetR13_1: R13.1 T3.1 | length 2.1
  Top w0.3: R13.1@125.2,167.35 125.2,165.6 T3.1@125.45,165.35
NetR16_1: R16.1 SD1.2 U26.4 | length 34.2
  Top w0.3: U26.4@98.35,78 105.6,78 108,75.6 110.35,75.6 111.2,74.75 119.65,74.75 120.9,76 v1(120.9,83.95) SD1.2@119.05,83.95
NetR18_1: R18.1 U8.1 U25.27 | length 66.5
  Top w0.45: v1(57.65,51.85) 60.5,49 U25.27@60.5,47.8 ; v1(87.45,74.2) 103.097,74.2 R18.1@104.497,72.8 104.55,72.747 U8.1@104.55,71.04
  High speed w0.3: v1(57.65,51.85) 57.65,51.9 62.45,56.7 73.4,56.7 84.55,67.85 84.55,72.6 86.15,74.2 v1(87.45,74.2)
NetR19_1: R19.1 U8.2 U8.3 U25.29 | length 67.4
  Top w0.45: v1@57.65,45.1 58.9,46.35 U25.29@58.9,47.8 ; v1(88.35,72.75) 97.6,72.75 101.8,68.55 104.55,68.55 U8.2@104.55,69.77
  High speed w0.3: v1(57.6,45.1) 57.6,45.15 61.25,48.8 66.9,48.8 85.55,67.45 85.55,72.15 86.15,72.75 v1(88.35,72.75)
NetR20_1: R20.1 R22.2 U10.6 | length 3.9
  Top w0.4: R20.1@86.95,163.55 86.947,163.553 R22.2@86.947,165 U10.6@89.347,165
NetR21_2: R21.2 U11.7 | length 2
  Top w0.4: U11.7@107.097,165 R21.2@109.097,165
NetR23_2: R23.2 R25.1 U11.1 | length 4.6
  Top w0.4: R25.1@99.75,166.6 R25.1@99.95,166.4 ; R25.1@99.8,166.3 101.667,166.3 U11.1@101.697,166.27 101.917,166.27 R23.2@103.447,167.8
NetR25_2: R25.2 R26.2 U11.2 | length 3.3
  Top w0.4: R26.2@98.2,164.797 R25.2@99.75,164.797 ; R25.2@99.903,165 U11.2@101.697,165
NetR27_1: R27.1 R29.2 U13.6 | length 3.7
  Top w0.4: R27.1@58.25,164.2 R29.2@58.25,165.7 58.35,165.6 U13.6@60.45,165.6
NetR28_2: R28.2 U14.7 | length 2.3
  Top w0.45: U14.7@76.85,165.6 79.053,165.6 R28.2@79.15,165.503
NetR31_2: R31.2 R32.1 U14.1 | length 4
  Top w0.45: R32.1@69.45,167.403 69.983,166.87 U14.1@71.45,166.87 71.45,168.597 R31.2@71.447,168.6
NetR32_2: R32.2 R33.2 U14.2 | length 3.6
  Top w0.45: R33.2@67.9,165.55 67.95,165.6 R32.2@69.45,165.6 U14.2@71.45,165.6
NetR34_1: R34.1 R36.2 U17.6 | length 3.8
  Top w0.45: R34.1@34.35,163.95 34.35,165.203 34.15,165.403 36.433,165.403 U17.6@36.45,165.42
NetR35_2: R35.2 U18.7 | length 2
  Top w0.45: U18.7@52.8,165.42 R35.2@54.767,165.42
NetR38_2: R38.2 R39.1 U18.1 | length 3.9
  Top w0.45: R39.1@45.45,167.2 45.96,166.69 U18.1@47.4,166.69 R38.2@47.4,168.45
NetR39_2: R39.2 R40.2 U18.2 | length 3.6
  Top w0.45: R40.2@43.85,165.4 43.87,165.42 U18.2@47.4,165.42
NetR41_1: R41.1 U25.51 U*1.4 | length 83.2
  Top w0.4: v1(56.25,27.35) 56.25,27.3 58.1,29.15 U25.51@58.1,32.5 ; U*1.4@71.3,75.39 72.537,75.39 R41.1@72.547,75.4 72.547,75.153 v1(74.2,73.5)
  Bottom w0.4: v1(56.25,27.35) 55.2,26.3 50.619,26.3 45.2,31.719 45.2,52.45 54.95,62.2 64.9,62.2 74.2,71.5 v1(74.2,73.5)
NetR42_1: R42.1 U25.48 U*2.4 | length 93.8
  Top w0.4: v1(51.95,30.35) 54.85,33.25 U25.48@54.85,34.15 ; U*2.4@71.2,94.636 72.533,94.636 R42.1@72.547,94.65 72.547,94.353 73.95,92.95 v1@74.3,92.95
  Bottom w0.4: v1(51.95,30.35) 50.5,30.35 48.1,32.75 48.1,51.3 56.3,59.5 67.2,59.5 77.35,69.65 77.35,89.9 v1@74.3,92.95
  other v1: 74.2,92.95
NetR43_1: R43.1 R45.1 | length 2.1
  Top w0.4: R45.1@52.95,75.35 R43.1@55.05,75.35
NetR44_2: R44.2 R45.2 | length 2.2
  Top w0.4: R44.2@47.75,75.35 R45.2@49.95,75.35
NetR47_1: R47.1 R49.1 | length 2.1
  Top w0.5: R49.1@52.7,94.55 R47.1@54.75,94.55
NetR48_2: R48.2 R49.2 | length 2.1
  Top w0.5: R48.2@47.4,94.55 R49.2@49.5,94.55
NetR51_1: R51.1 U25.50 U*3.4 | length 86.5
  Top w0.4: v1(55.15,28.9) 57.3,31.05 U25.50@57.3,32.5 ; U*3.4@71.3,81.872 72.478,81.872 v1@74.15,80.2
  Bottom w0.4: v1(55.15,28.9) 55.15,28.75 53.9,27.5 50.55,27.5 46.15,31.9 46.15,52.2 55.15,61.2 65.35,61.2 75.55,71.4 75.55,78.85 v1(74.2,80.2)
NetR52_1: R52.1 U25.47 U*4.4 | length 98.7
  Top w0.4: v1(50.95,31.8) 50.95,32.8 53.1,34.95 U25.47@54.85,34.95 ; U*4.4@71.2,100.918 72.729,100.918 72.747,100.9 72.747,100.603 74.1,99.25 v1(74.2,99.25) v1@74.5,99.25
  Bottom w0.4: v1(50.95,31.8) 50.8,31.8 49,33.6 49,50.7 56.8,58.5 67.95,58.5 78.35,68.9 78.35,95.1 v1(74.2,99.25)
NetR53_1: R53.1 R55.1 | length 2.1
  Top w0.4: R55.1@52.9,82 R53.1@55,82
NetR54_2: R54.2 R55.2 | length 2.1
  Top w0.4: R54.2@47.75,82 R55.2@49.85,82
NetR57_1: R57.1 R59.1 | length 2.1
  Top w0.5: R59.1@52.8,100.85 R57.1@54.85,100.85
NetR58_2: R58.2 R59.2 | length 2.2
  Top w0.5: R58.2@47.65,100.85 R59.2@49.8,100.85
NetR61_1: R61.1 U25.49 U*5.4 | length 89.6
  Top w0.4: v1(53.25,28.8) 53.25,28.85 56.5,32.1 U25.49@56.5,32.5 ; U*5.4@71.3,88.304 72.696,88.304 72.7,88.3 72.7,87.9 v1@74.4,86.2
  Bottom w0.4: v1(53.25,28.8) 50.8,28.8 47.1,32.5 47.1,51.75 55.75,60.4 66.35,60.4 76.55,70.6 76.55,83.95 v1@74.55,85.95
  other v1: 74.2,86.2
NetR62_1: R62.1 U25.46 U*6.4 | length 100.8
  Top w0.4: v1(50.4,34.85) 50.9,34.85 51.8,35.75 U25.46@54.85,35.75 ; U*6.4@71.1,108 R62.1@72.7,108 72.7,107.45 74.15,106 v1(74.15,105.85)
  Bottom w0.4: v1(50.4,34.85) 50.45,34.9 50.45,50.7 57.05,57.3 68.5,57.3 79.2,68 79.2,100.75 v1@74.2,105.75
NetR63_1: R63.1 R65.1 | length 2.1
  Top w0.4: R65.1@52.95,88.47 R63.1@55.05,88.47
NetR64_2: R64.2 R65.2 | length 2.1
  Top w0.5: R64.2@47.8,88.55 R65.2@49.9,88.55
NetR67_1: R67.1 R69.1 | length 2.1
  Top w0.5: R69.1@50.65,107.2 R67.1@52.75,107.2
NetR68_2: R68.2 R69.2 | length 2.1
  Top w0.5: R68.2@45.55,107.2 R69.2@47.65,107.2
NetR103_1: R103.1 U25.58 U26.2 | length 88.6
  Top w0.3: U25.58@63.7,32.5 63.7,27.9 65.5,26.1 78.05,26.1 85.55,33.6 85.55,65.8 82.8,68.55 v1(82.8,77.35) ; v1@92.35,79 R103.1@93.8,79 93.85,78.95 U26.2@95.65,78.95
  HighSpeed w0.3: v1(82.8,77.35) 84.45,79 v1@92.25,79
  other v1: 92.3,78.95
NetSD1_SWB: SD1.SWB
NetU8_4: U8.4 U25.28 | length 63.5
  Top w0.3: v1(59.4,44.85) 59.4,44.9 59.7,45.2 U25.28@59.7,47.8
  Top w0.45: v1(87.15,71.4) 96.55,71.4 100.72,67.23 U8.4@104.55,67.23
  High speed w0.3: v1(59.4,44.85) 59.4,45.4 61.95,47.95 67.5,47.95 87.15,67.6 v1(87.15,71.4)
NetU9_6: U9.6 U25.14 | length 97.5
  Top w0.3: v1(66.6,43.1) 68.05,44.55 U25.14@70.15,44.55 ; U9.6@90.953,124.092 v1(91.842,124.092)
  HighSpeed w0.3: v1(66.6,43.1) 67.25,43.1 74.7,50.55 74.7,63.65 79.3,68.25 79.3,112.6 90.8,124.1 90.808,124.092 v1(91.842,124.092)
NetU12_6: U12.6 U25.10 | length 103.2
  Top w0.3: v1(66,41) 66.35,41.35 U25.10@70.15,41.35 ; U12.6@94.95,124.092 v1@95.892,124.092
  HighSpeed w0.3: v1(66,41) 66.85,41 75.75,49.9 75.75,63.45 80.1,67.8 80.1,111.6 89.25,120.75 90.55,120.75 93.95,124.15 v1(95.95,124.15)
NetU15_6: U15.6 U25.25 | length 88.6
  Top w0.3: v1(61.35,45.3) 62.1,46.05 U25.25@62.1,47.8 ; U15.6@74.965,124.092 v1@75.742,124.092 ; v1(75.9,124.1) v1@76.05,124.1
  HighSpeed w0.3: v1(61.35,45.3) 66.6,50.55 66.6,60.35 75.9,69.65 v1(75.9,124.1)
NetU16_6: U16.6 U25.16 | length 93.7
  Top w0.3: v1(64.95,44.15) 64.95,45.1 66,46.15 U25.16@70.15,46.15 ; U16.6@78.962,124.092 v1@79.892,124.092
  HighSpeed w0.3: v1(64.95,44.15) 64.95,46.1 71.4,52.55 71.4,63.9 76.75,69.25 76.75,120.95 v1(79.9,124.1)
NetU19_6: U19.6 U25.15 | length 91
  Top w0.3: v1(66.6,44.85) 67.1,45.35 U25.15@70.15,45.35 ; U19.6@82.959,124.092 v1@83.792,124.092
  HighSpeed w0.3: v1(66.6,44.85) 66.6,46.5 72.35,52.25 72.35,63.65 77.6,68.9 77.6,117.9 v1(83.8,124.1)
NetU20_6: U20.6 U25.17 | length 85.9
  Top w0.3: U25.17@68.5,47.8 v1(69.7,47.8) ; U20.6@86.956,124.092 v1@87.842,124.092
  HighSpeed w0.3: v1(69.7,47.8) 73.35,51.45 73.35,63.35 78.45,68.45 78.45,114.7 v1(87.85,124.1)
NetU21_7: U21.7 U23.5 | length 13.5
  Top w0.3: U23.5@85.125,97.55 86.25,97.55 87.25,98.55 87.25,107 86.25,108 U21.7@85.125,108
NetU21_9: U21.9 U23.9 U24.9 U25.32 | length 95.2
  Top w0.3: v1(56.4,50.05) 56.5,49.95 U25.32@56.5,47.8 ; v1(85.95,82.15) 86.6,82.15 88.29,83.84 U24.9@90.675,83.84 93.29,83.84 95.55,86.1 v1(95.55,93.55) 95.55,101.3 v1(94.85,102) ; v1(90.3,105.3) 90.3,106.965 U21.9@90.675,107.34 ; v1@90.675,94.625 U23.9@90.675,95.59
  HighSpeed w0.3: v1(90.3,105.3) 91.85,105.3 94.85,102.3 v1(94.85,102) ; v1(90.7,94.6) 94.5,94.6 v1(95.55,93.55)
  High speed w0.3: v1(56.4,50.05) 56.4,52.55 61.35,57.5 72.65,57.5 83.65,68.5 83.65,73.65 85.95,75.95 v1(85.95,82.15)
NetU21_10: U21.10 U22.5 U23.10 U24.10 | length 63.3
  Top w0.254: U24.10@90.675,84.49 89.51,84.49 88.45,85.55 88.45,94.95 88.325,95.075 ; U23.10@90.675,96.24 89.49,96.24 88.325,95.075 ; U21.10@90.675,107.99 89.74,107.99 88.35,106.6 ; U22.5@106.3,120.27 105.18,120.27 104,121.45 104,123 103.05,123.95 99.6,123.95 99.1,123.45 99.1,122.95 93.7,117.55 90.5,117.55 88.35,115.4 88.35,106.6 ; 88.325,95.075 87.4,96 87.4,97.55 88.05,98.2 88.05,106.3 88.35,106.6
NetU23_7: U23.7 U24.5 | length 13.2
  Top w0.3: U24.5@85.125,85.8 83.85,85.8 83.55,86.1 83.55,95.8 84,96.25 U23.7@85.125,96.25
NetU24_6: U24.6 U25.4 | length 73.2
  Top w0.3: U25.4@70.15,36.55 73.5,36.55 76.1,33.95 v1(76.65,33.95) ; U24.6@85.125,85.15 83.8,85.15 83.65,85 83.65,81.45 84.8,80.3 84.8,69.2 88.05,65.95 v1@88.05,35.35
  HighSpeed w0.3: v1(76.65,33.95) 76.8,33.95 77.55,33.2 85.95,33.2 v1(88.1,35.35)
NetU24_11: U24.11 U25.5 | length 81.8
  Top w0.3: U25.5@70.15,37.35 74.25,37.35 v1(74.6,37) ; v1(88,81.1) 85.75,78.85 85.75,69.5 89.6,65.65 v1(89.6,38.05) ; U24.11@90.675,85.14 92.51,85.14 v1(92.6,85.05)
  HighSpeed w0.3: v1(74.6,37) 74.6,34 76.45,32.15 87.35,32.15 89.65,34.45 v1@89.65,38.15 ; v1(88,81.1) 91.95,85.05 v1(92.6,85.05)
NetU25_44: U25.44
NetU25_45: U25.45
SPCK_3: SD1.5 U5.4 | length 5.4
  Top w0.25: U5.4@113.65,80.65 SD1.5@119.05,80.65
pads on no net: D10.3 D11.3 D12.3 D13.3 D14.3 D15.3 D16.3 D17.3 D18.3 D19.3 D20.3 D21.3 D22.3 J1.3 J1.4 J1.6 J1.8 P3.3 SD1.1 SD1.8 SD1.P1 SD1.P2 SD1.P3 SD1.P4 T4.3 T5.3 T6.3 U1.2 U1.3 U22.6 U22.8 U22.9 U22.10 U22.11 U22.12 U22.13 U24.2 U24.7 U24.14 U25.1 U25.6 U25.18 U25.19 U25.26 U25.30 U25.31 U25.33 U25.34 U25.43 U25.54 U25.55 U25.56 U25.57

## Polygon pours and split planes (outlines as drawn)
GND on Bottom "Bottom-No Net" (solid, pour order 64): 50,126.75 52.05,126.75 52.5,126.3 52.5,125.3 52.2,125 49.95,125 49.6,125.35 49.6,126.45
+6.5V on Bottom "Bottom-No Net" (solid, pour order 66): 101.1,35.4 103.15,35.4 103.6,34.95 103.6,33.95 103.3,33.65 101.05,33.65 100.7,34 100.7,35.1
"+5V Proc" on Bottom "Bottom-No Net" (solid, pour order 62): 50.25,124.4 52.3,124.4 52.75,123.95 52.75,122.95 52.45,122.65 50.2,122.65 49.85,123 49.85,124.1
+6.5V on Bottom "Bottom-No Net" (solid, pour order 60): 53.05,122.1 55.1,122.1 55.55,121.65 55.55,120.65 55.25,120.35 53,120.35 52.65,120.7 52.65,121.8
+24V_Pwr on Bottom "Bottom-No Net" (solid, pour order 58): 125.3,60.8 126.6,60.8 127.3,61.5 127.3,75 130.55,78.25 130.55,109.8 131.65,110.9 131.65,113.2 130.65,114.2 128.7,114.2 127.8,113.3 127.8,80.35 123.1,75.65 123.1,61.15
no net on Bottom "Top Layer-No Net 1" (solid, remove dead copper, pour order 36): 128.27,71.374 131.191,71.374 131.826,70.739 131.953,70.612 131.953,68.58 131.953,68.326 131.191,67.564 128.524,67.564 127.889,68.199 127.889,70.739
GND on Bottom "Top Layer-No Net 1" (solid, remove dead copper, pour order 32): 128.016,51.054 131.953,51.054 132.588,50.419 132.969,50.038 132.969,47.625 132.08,46.736 130.556,46.736 128.27,46.736 127.254,47.752 127.127,47.879 127.127,50.292
GND on Top "Top-GND" (hatched 90Degree grid 0.508 track 0.203, remove dead copper, pour order 70): 46.75,51.95 52.05,57.25 76.85,57.25 86.65,47.45 86.65,29.25 82.2,24.8 51.75,24.8 46.75,29.8
+6.5V on Top "Bottom-No Net" (solid, pour order 68): 101.225,35.45 103.275,35.45 103.725,35 103.725,34 103.425,33.7 101.175,33.7 100.825,34.05 100.825,35.15
GND on Top "Top-GND" (solid, pour order 54): 98.15,26.45 106.05,26.45 106.8,25.7 106.8,25.1 106.5,24.8 100.55,24.8 99.5,25.85 98.15,25.85
NetC1_1 on Top "Top-GND" (solid, pour order 38): 126.35,36.75 126.35,40.15 125.9,40.6 113.6,40.6 112.95,41.25 113.5,41.8 113.5,41.85 114.25,42.6 126.45,42.6 128,41.05 128,36.647
GND on Top "Top-GND" (solid, pour order 40): 123.4,39.85 125.1,39.85 125.7,39.25 125.7,30.4 127.15,28.95 127.15,26.55 124.95,24.35 110.05,24.35 109.1,25.3 109.15,25.35 109.15,25.85 109.5,26.2 121.15,26.2 122.453,27.8 122.95,31.5 122.95,39.7 123.05,39.8
+6.5V on Top "Top-GND" (solid, pour order 42): 110.1,32.75 109.45,32.1 109.45,27.55 109.95,27.05 115.6,27.05 116,27.45 116,32.1 115.35,32.75
NetC5_2 on Top "Top-GND" (solid, pour order 44): 126.4,35.6 128.35,35.6 129.35,36.6 132.25,36.6 133.1,35.75 133.1,35.15 132.85,34.9 129.05,34.9 128.9,35.05 126.4,35.05
GND on Top "Top-GND" (solid, pour order 46): 126.4,34.35 132.8,34.35 133.05,34.1 133.05,33 132.35,32.3 129.55,32.3 128.1,33.75 126.55,33.75 126.4,33.9 126.45,33.95 126.55,33.95
GND on Top "Top-GND" (solid, pour order 50): 133.05,33 134.15,31.9 134.15,31.3 133.6,30.75 131.35,30.75 130.05,32.05 130.05,32.5
"+5V Noise" on Top "Top-GND" (solid, pour order 52): 98.1,28.75 106,28.75 106.75,28 106.75,27.4 106.45,27.1 100.5,27.1 99.45,28.15 98.1,28.15
GND on Gnd (split plane): 129.49,140.441 113.361,140.441 113.312,140.436 113.263,140.431 113.262,140.431 113.261,140.431 113.214,140.416 113.167,140.402 113.166,140.402 113.122,140.378 113.079,140.356 113.078,140.355 113.077,140.355 113.039,140.323 113.001,140.292 113,140.291 112.969,140.253 112.938,140.215 112.937,140.214 112.913,140.17 112.89,140.127 112.89,140.126 112.889,140.125 112.875,140.078 112.861,140.031 112.86,140.03 112.856,139.981 112.851,139.932 112.846,138.432 112.846,138.431 112.846,138.43 112.85,138.381 112.855,138.332 112.855,138.331 112.855,138.33 112.87,138.283 112.884,138.236 112.884,138.235 112.908,138.191 112.931,138.148 112.931,138.147 112.932,138.146 112.963,138.108 112.994,138.07 112.995,138.07 112.995,138.069 113.033,138.038 113.071,138.007 113.072,138.006 113.116,137.982 113.159,137.959 113.16,137.959 113.161,137.958 113.208,137.944 113.255,137.93 113.256,137.93 113.256,137.929 113.305,137.925 113.354,137.92 113.355,137.92 113.356,137.92 128.343,137.92 128.343,123.53 128.352,123.43 128.381,123.335 128.429,123.246 128.492,123.169 128.592,123.069 128.669,123.006 128.758,122.958 128.853,122.929 128.953,122.92 134.843,122.92 134.843,23.94 23.863,23.94 23.863,75.225 29.25,75.225 38.2,66.275 65.075,66.275 65.25,66.45 65.6,66.45 69.45,70.3 69.45,96.767 69.45,109.825 69.45,110 62.45,117 23.863,117 23.863,122.92 30.503,122.92 30.603,122.929 30.698,122.958 30.787,123.006 30.864,123.069 30.927,123.146 30.975,123.235 31.004,123.33 31.013,123.43 31.013,137.92 46,137.92 46.1,137.929 46.195,137.958 46.284,138.006 46.361,138.069 46.424,138.146 46.472,138.235 46.501,138.33 46.51,138.43 46.51,139.93 46.501,140.03 46.472,140.125 46.424,140.214 46.361,140.291 46.284,140.354 46.195,140.402 46.1,140.431 46,140.44 29.51,140.44 29.51,170.87 129.49,170.87
"+5V Noise" on Power (split plane): 129.49,140.441 113.361,140.441 113.312,140.436 113.263,140.431 113.262,140.431 113.261,140.431 113.214,140.416 113.167,140.402 113.166,140.402 113.122,140.378 113.079,140.356 113.078,140.355 113.077,140.355 113.039,140.323 113.001,140.292 113,140.291 112.969,140.253 112.938,140.215 112.937,140.214 112.913,140.17 112.89,140.127 112.89,140.126 112.889,140.125 112.875,140.078 112.861,140.031 112.86,140.03 112.856,139.981 112.851,139.932 112.846,138.432 112.846,138.431 112.846,138.43 112.85,138.381 112.855,138.332 112.855,138.331 112.855,138.33 112.87,138.283 112.884,138.236 112.884,138.235 112.908,138.191 112.931,138.148 112.931,138.147 112.932,138.146 112.963,138.108 112.994,138.07 112.995,138.07 112.995,138.069 113.033,138.038 113.071,138.007 113.072,138.006 113.116,137.982 113.159,137.959 113.16,137.959 113.161,137.958 113.208,137.944 113.255,137.93 113.256,137.93 113.256,137.929 113.305,137.925 113.354,137.92 113.355,137.92 113.356,137.92 128.343,137.92 128.343,123.53 128.352,123.43 128.381,123.335 128.429,123.246 128.492,123.169 128.592,123.069 128.669,123.006 128.758,122.958 128.853,122.929 128.953,122.92 134.843,122.92 134.843,23.94 23.863,23.94 23.863,75.2 36.1,75.2 45.05,66.25 69.5,66.25 70.9,67.65 70.9,115.2 69.3,116.8 23.863,116.8 23.863,122.92 30.503,122.92 30.603,122.929 30.698,122.958 30.787,123.006 30.864,123.069 30.927,123.146 30.975,123.235 31.004,123.33 31.013,123.43 31.013,137.92 46,137.92 46.1,137.929 46.195,137.958 46.284,138.006 46.361,138.069 46.424,138.146 46.472,138.235 46.501,138.33 46.51,138.43 46.51,139.93 46.501,140.03 46.472,140.125 46.424,140.214 46.361,140.291 46.284,140.354 46.195,140.402 46.1,140.431 46,140.44 29.51,140.44 29.51,170.87 129.49,170.87

## Other copper
Top:
High speed:
  region: 118.95,89.5
  region: 118.95,89.5
Gnd (plane layer: these items are gaps in the copper):
  pour cut-out: 79.75,160.625 96.85,160.625 99.35,158.125 99.35,150.975 98.2,149.825 80.8,149.825 78.9,151.725 78.9,159.625
  pour cut-out: 55.35,160.625 72.45,160.625 74.95,158.125 74.95,150.975 73.8,149.825 56.4,149.825 54.5,151.725 54.5,159.625
  pour cut-out: 31.1,160.6 48.2,160.6 50.7,158.1 50.7,150.95 49.55,149.8 32.15,149.8 30.25,151.7 30.25,159.6
  pour cut-out: 11.75,116.825 62.45,116.825 69.45,109.825 69.45,70.65 65.075,66.275 38.2,66.275 29.25,75.225 11.9,75.225
  pour cut-out: 11.75,117 62.45,117 69.45,110 69.45,70.3 65.6,66.45 38.2,66.45 29.25,75.4 11.9,75.4
Power (plane layer: these items are gaps in the copper):
  pour cut-out: 81.42,151.85 81.42,159.6 82.62,160.8 99.42,160.8 102.22,158 102.22,150.85 101.02,149.65 82.67,149.65
  pour cut-out: 57.2,151.85 57.2,159.6 58.4,160.8 75.2,160.8 78,158 78,150.85 76.8,149.65 58.45,149.65
  pour cut-out: 32.9,151.85 32.9,159.6 34.1,160.8 50.9,160.8 53.7,158 53.7,150.85 52.5,149.65 34.15,149.65
  pour cut-out: 18.6,116.8 69.3,116.8 70.9,115.2 70.9,67.65 69.5,66.25 45.05,66.25 36.1,75.2 18.75,75.2

## Silkscreen, mask and mechanical layers (free items; w line width, h text height)
Top Overlay:
  drawing of 1860 lines, arcs and shapes, not listed
  text "........" at 76.623,146.2 h1.1
  text "CT" at 78.2,143.55 h2
  text "........" at 76.623,142.644 h1.1
  text "........" at 87.773,120.4 h1.1
  text "CNT" at 88.408,117.733 h2
  text "........" at 87.773,116.844 h1.1
  text ".................." at 49.6,113.5 h1.1
  text "DI 220DC" at 50,110.8 h2
  text ".................." at 49.5,110.05 h1.1
  text "Russia" at 76.229,70.68 h1.5
  text "........" at 110.323,63.5 h1.1
  text "www.igasdetection.com" at 84.865,61.409 h1.1
  text "X2X" at 110.958,60.833 h2
  text "........" at 110.323,59.944 h1.1
  text "LCT1114" at 94.75,56.74 h2
  text "............." at 99.081,55.521 h0.8
  text "AIN" at 42.367,53.758 h2 r90
  text "........" at 39.7,53.123 h1.1 r90
  text "........" at 43.256,53.123 h1.1 r90
  text "Rev.1" at 99.831,53.121 h1.52
  text "............." at 99.131,52.021 h0.8
  text "........" at 99.023,49.75 h1.1
  text "PSU" at 99.658,47.083 h2
  text "........" at 99.023,46.194 h1.1
  text "CPU" at 50.412,40.512 h2 r90
  text "........" at 47.745,39.75 h1.1 r90
  text "........" at 51.301,39.75 h1.1 r90
  text "ADR" at 42.117,35.958 h2 r90
  text "........" at 39.45,35.323 h1.1 r90
  text "........" at 43.006,35.323 h1.1 r90
  text "...." at 90.897,31.588 h2.5 r270
  text "........" at 47.35,30.2 h3 r180
  text "LORENTZ" at 31.65,26.2 h2
  text "........" at 47.35,24.8 h3 r180
Dimension:
  lines w0.2: 30.503,138.43 46,138.43 46,139.93 29,139.93 29,171.38 130,171.38 130,139.93 113.361,139.93 113.356,138.43 128.853,138.43
  lines w0.35: 23.353,123.43 30.478,123.43 ; 23.403,123.35 23.403,23.43 135.353,23.43 135.353,123.33 135.253,123.43 128.953,123.43 128.853,123.53 128.853,138.43 ; 30.503,123.43 30.503,138.43
tValues:
  text "PC" at 114.3,147.066 h1.1
  text "S3" at 103.759,146.812 h1.1
  text "S1" at 108.331,146.812 h1.1
  text "S2" at 108.331,140.843 h1.1
  text "S4" at 103.632,140.716 h1.1
  text "HMI" at 113.919,140.716 h1.1
Scriber:
  lines w0.2: 22,138.4 130.98,138.38
Milling (Mech14):
  lines w0.2: 45.55,134.8 51.55,134.8 51.55,136.4 45.55,136.4 45.55,134.8 ; 51.05,138.43 51.055,139.93 77.153,139.93 77.153,138.43 51.05,138.43 ; 76.703,134.8 76.703,136.4 82.703,136.4 82.703,134.8 76.703,134.8 ; 82.203,138.43 82.208,139.93 108.306,139.93 108.306,138.43 82.203,138.43 ; 107.856,134.8 107.856,136.4 113.856,136.4 113.856,134.8 107.856,134.8

## Text inside footprints (layer, text, board x,y; h text height)
J1: Top Overlay "1" at 75.61,46.61 h1.5 r270
SD1: Dimension "PCB Edge" at 134.833,77.09 h1.88 r90